# Altium PCB PCB1.PcbDoc (part 3 of 3)
Units mm, origin at the board's own origin, x right, y up, seen from the top; angles counter-clockwise.
Board outline 55.24 x 34.04 mm, 2 copper layers (Top Layer, Bottom Layer), stack 3.048 mm thick; 216 components, 8 nets, 576 pads, 0 vias.
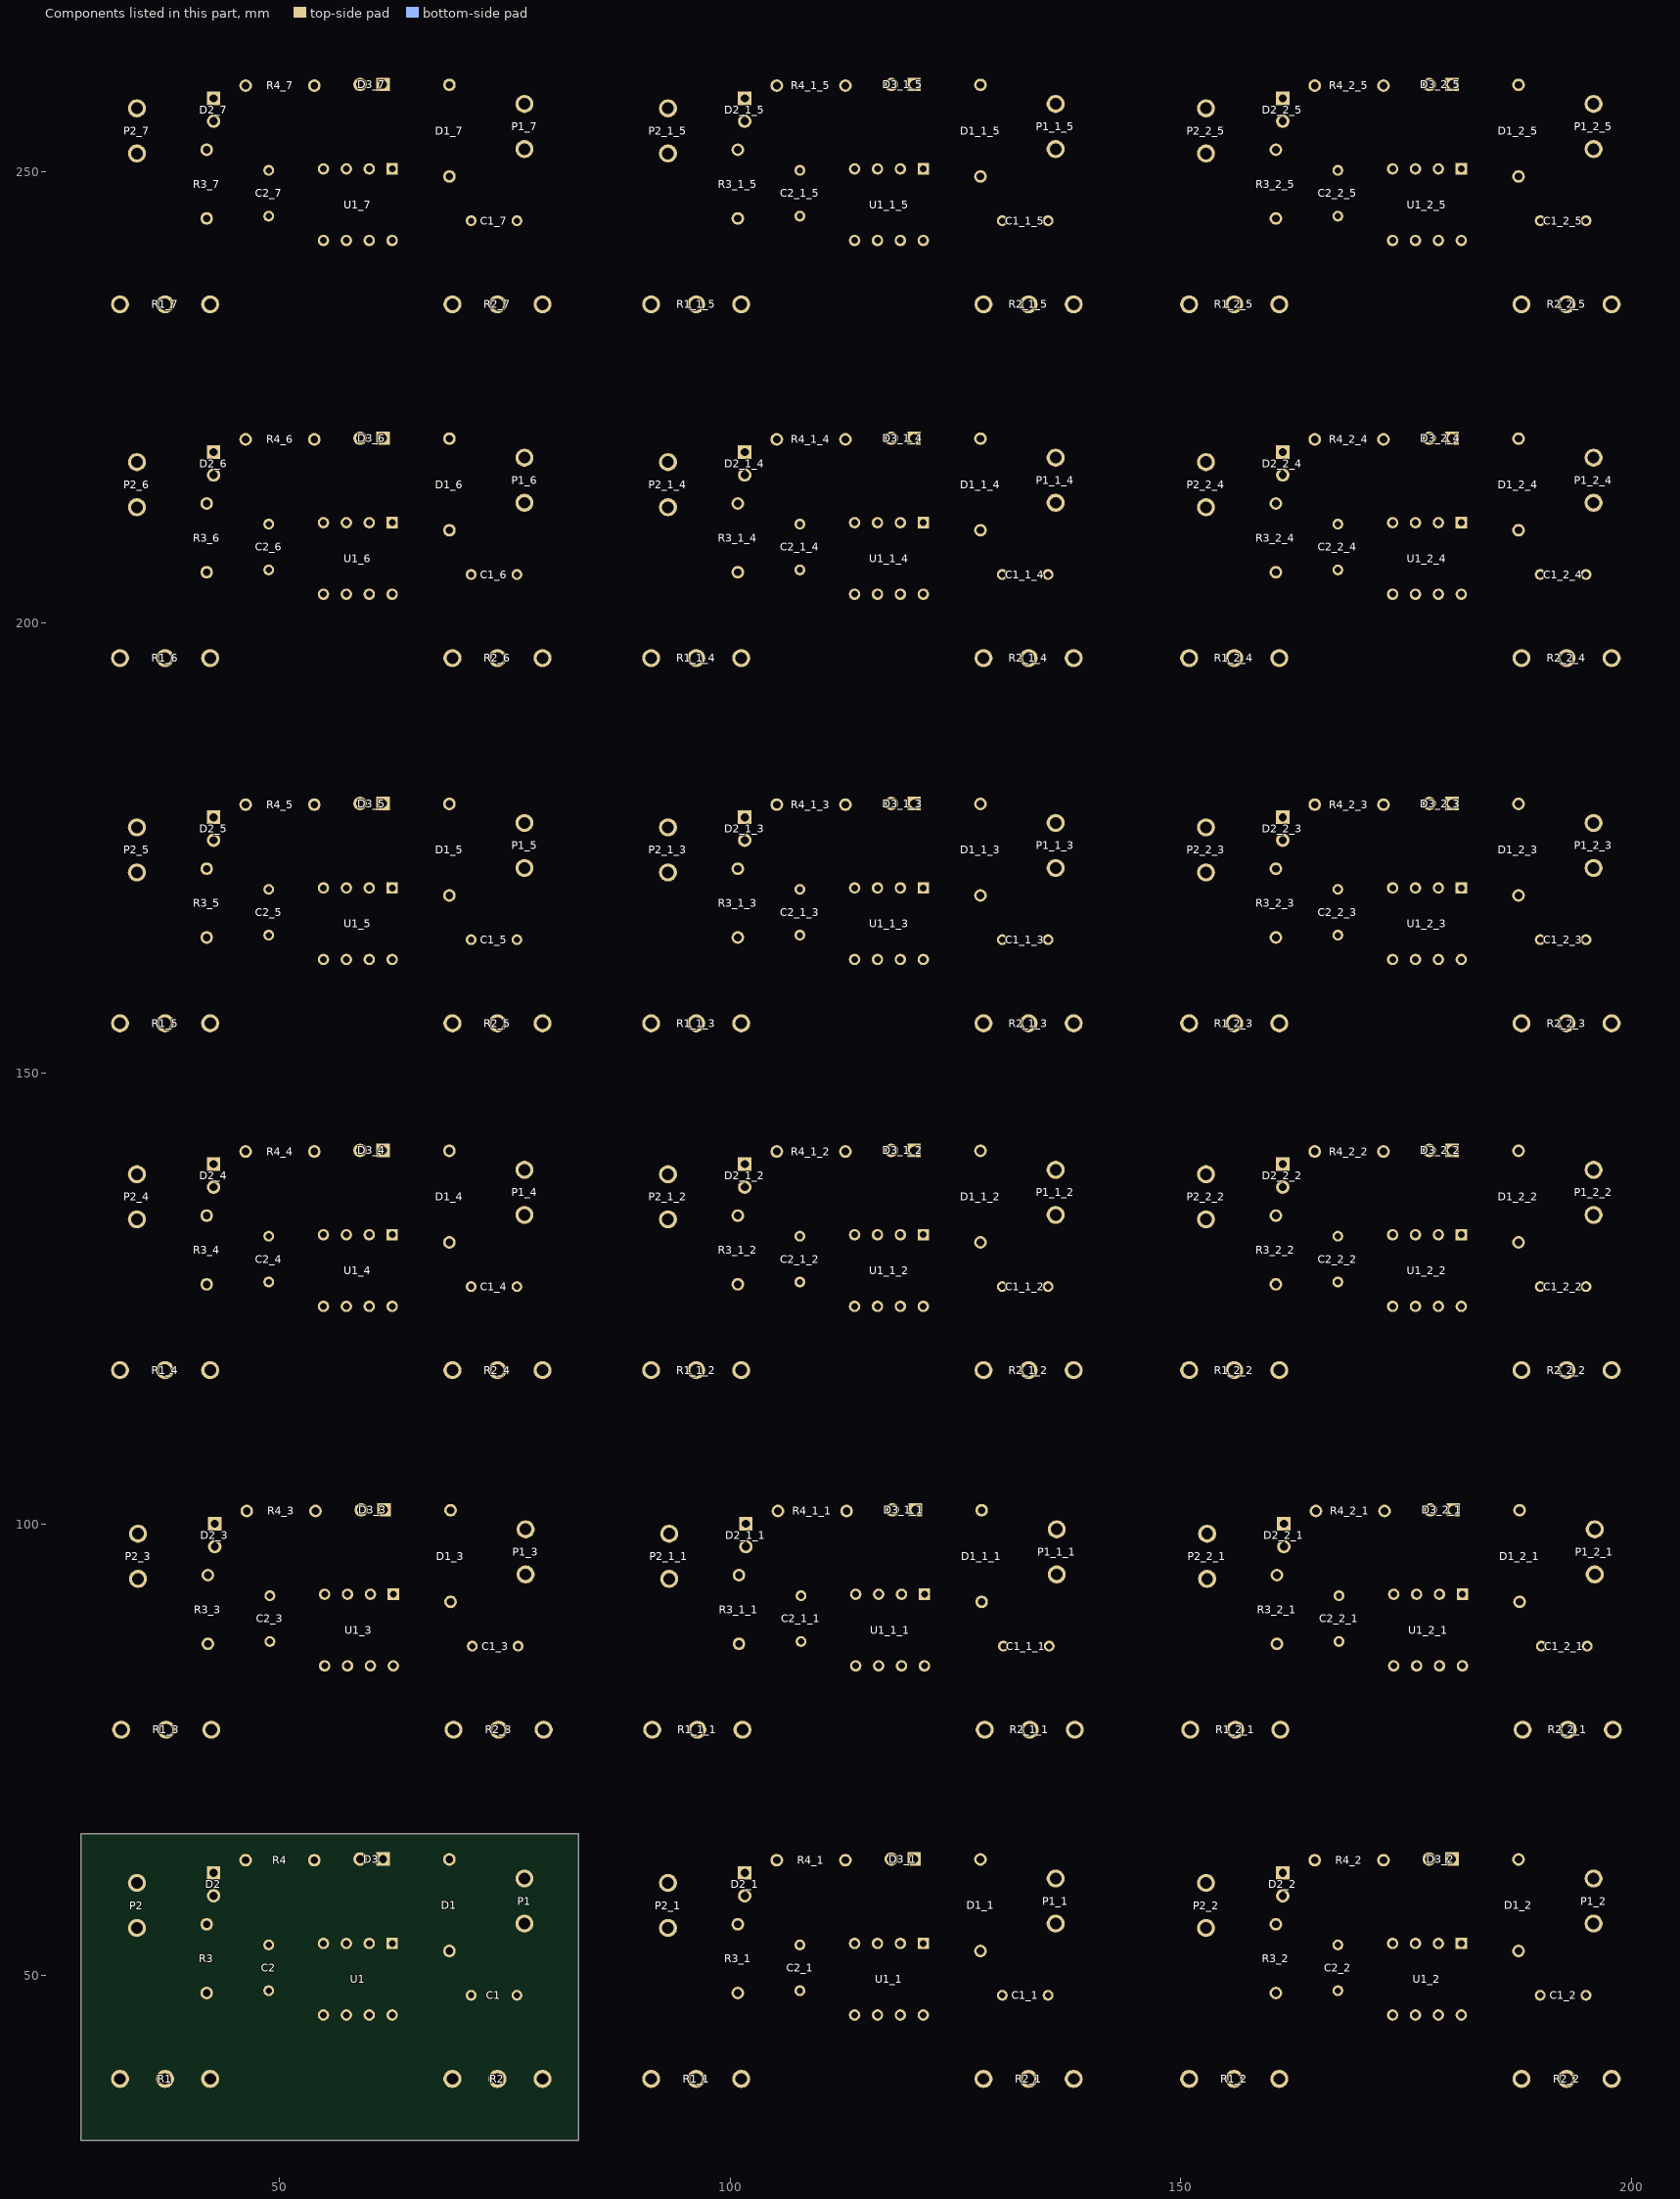
[diagram p3: the components of this part, seen from the top]

## Silkscreen, mask and mechanical layers (free items; w line width, h text height)
Top Overlay:
  text "GND" at 39.37,260.421 h1.52
  text "GND" at 98.298,260.421 h1.52
  text "GND" at 157.988,260.421 h1.52
  text "GND" at 69.792,260.35 h1.52
  text "GND" at 128.72,260.35 h1.52
  text "GND" at 188.41,260.35 h1.52
  text "Vcc" at 76.581,247.332 h1.52
  text "Vcc" at 135.509,247.332 h1.52
  text "Vcc" at 195.199,247.332 h1.52
  text "Out" at 31.369,247.015 h1.52
  text "Out" at 90.297,247.015 h1.52
  text "Out" at 149.987,247.015 h1.52
  text "by Wesley" at 47.498,233.299 h1.8
  text "by Wesley" at 106.426,233.299 h1.8
  text "by Wesley" at 166.116,233.299 h1.8
  text "GND" at 39.37,221.178 h1.52
  text "GND" at 98.298,221.178 h1.52
  text "GND" at 157.988,221.178 h1.52
  text "GND" at 69.792,221.107 h1.52
  text "GND" at 128.72,221.107 h1.52
  text "GND" at 188.41,221.107 h1.52
  text "Vcc" at 76.581,208.089 h1.52
  text "Vcc" at 135.509,208.089 h1.52
  text "Vcc" at 195.199,208.089 h1.52
  text "Out" at 31.369,207.772 h1.52
  text "Out" at 90.297,207.772 h1.52
  text "Out" at 149.987,207.772 h1.52
  text "by Wesley" at 47.498,194.056 h1.8
  text "by Wesley" at 106.426,194.056 h1.8
  text "by Wesley" at 166.116,194.056 h1.8
  text "GND" at 39.37,180.665 h1.52
  text "GND" at 98.298,180.665 h1.52
  text "GND" at 157.988,180.665 h1.52
  text "GND" at 69.792,180.594 h1.52
  text "GND" at 128.72,180.594 h1.52
  text "GND" at 188.41,180.594 h1.52
  text "Vcc" at 76.581,167.576 h1.52
  text "Vcc" at 135.509,167.576 h1.52
  text "Vcc" at 195.199,167.576 h1.52
  text "Out" at 31.369,167.259 h1.52
  text "Out" at 90.297,167.259 h1.52
  text "Out" at 149.987,167.259 h1.52
  text "by Wesley" at 47.498,153.543 h1.8
  text "by Wesley" at 106.426,153.543 h1.8
  text "by Wesley" at 166.116,153.543 h1.8
  text "GND" at 39.37,142.184 h1.52
  text "GND" at 98.298,142.184 h1.52
  text "GND" at 157.988,142.184 h1.52
  text "GND" at 69.792,142.113 h1.52
  text "GND" at 128.72,142.113 h1.52
  text "GND" at 188.41,142.113 h1.52
  text "Vcc" at 76.581,129.095 h1.52
  text "Vcc" at 135.509,129.095 h1.52
  text "Vcc" at 195.199,129.095 h1.52
  text "Out" at 31.369,128.778 h1.52
  text "Out" at 90.297,128.778 h1.52
  text "Out" at 149.987,128.778 h1.52
  text "by Wesley" at 47.498,115.062 h1.8
  text "by Wesley" at 106.426,115.062 h1.8
  text "by Wesley" at 166.116,115.062 h1.8
  text "GND" at 39.497,102.306 h1.52
  text "GND" at 98.425,102.306 h1.52
  text "GND" at 158.115,102.306 h1.52
  text "GND" at 69.919,102.235 h1.52
  text "GND" at 128.847,102.235 h1.52
  text "GND" at 188.537,102.235 h1.52
  text "Vcc" at 76.708,89.218 h1.52
  text "Vcc" at 135.636,89.218 h1.52
  text "Vcc" at 195.326,89.218 h1.52
  text "Out" at 31.496,88.9 h1.52
  text "Out" at 90.424,88.9 h1.52
  text "Out" at 150.114,88.9 h1.52
  text "by Wesley" at 47.625,75.184 h1.8
  text "by Wesley" at 106.553,75.184 h1.8
  text "by Wesley" at 166.243,75.184 h1.8
  text "GND" at 39.37,63.571 h1.52
  text "GND" at 98.298,63.571 h1.52
  text "GND" at 157.988,63.571 h1.52
  text "GND" at 69.792,63.5 h1.52
  text "GND" at 128.72,63.5 h1.52
  text "GND" at 188.41,63.5 h1.52
  text "Vcc" at 76.581,50.482 h1.52
  text "Vcc" at 135.509,50.482 h1.52
  text "Vcc" at 195.199,50.482 h1.52
  text "Out" at 31.369,50.165 h1.52
  text "Out" at 90.297,50.165 h1.52
  text "Out" at 149.987,50.165 h1.52
  text "by Wesley" at 47.498,36.449 h1.8
  text "by Wesley" at 106.426,36.449 h1.8
  text "by Wesley" at 166.116,36.449 h1.8
Mechanical 1:
  lines w0.254: 27.94,31.623 27.94,65.659 83.185,65.659 83.185,31.623 27.94,31.623 ; 27.94,110.236 83.185,110.236 83.185,144.272 27.94,144.272 27.94,110.236 ; 27.94,148.717 83.185,148.717 83.185,182.753 27.94,182.753 27.94,148.717 ; 27.94,189.23 83.185,189.23 83.185,223.266 27.94,223.266 27.94,189.23 ; 27.94,228.473 83.185,228.473 83.185,262.509 27.94,262.509 27.94,228.473 ; 28.067,70.358 83.312,70.358 83.312,104.394 28.067,104.394 28.067,70.358 ; 86.868,31.623 142.113,31.623 142.113,65.659 86.868,65.659 86.868,31.623 ; 86.868,110.236 86.868,144.272 142.113,144.272 142.113,110.236 86.868,110.236 ; 86.868,148.717 86.868,182.753 142.113,182.753 142.113,148.717 86.868,148.717 ; 86.868,189.23 86.868,223.266 142.113,223.266 142.113,189.23 86.868,189.23 ; 86.868,228.473 86.868,262.509 142.113,262.509 142.113,228.473 86.868,228.473 ; 86.995,70.358 86.995,104.394 142.24,104.394 142.24,70.358 86.995,70.358 ; 146.558,31.623 201.803,31.623 201.803,65.659 146.558,65.659 146.558,31.623 ; 146.558,110.236 146.558,144.272 201.803,144.272 201.803,110.236 146.558,110.236 ; 146.558,148.717 146.558,182.753 201.803,182.753 201.803,148.717 146.558,148.717 ; 146.558,189.23 146.558,223.266 201.803,223.266 201.803,189.23 146.558,189.23 ; 146.558,228.473 146.558,262.509 201.803,262.509 201.803,228.473 146.558,228.473 ; 146.685,70.358 146.685,104.394 201.93,104.394 201.93,70.358 146.685,70.358

## Dimensions
27.94,31.623 to 83.185,31.623 on Mechanical 1
27.94,31.623 to 27.94,65.659 on Mechanical 1